# Altium PCB PCB1.PcbDoc
Units mm, origin at the board's own origin, x right, y up, seen from the top; angles counter-clockwise.
Board outline 50 x 50 mm, 2 copper layers (Top Layer, Bottom Layer); 9 components, 8 nets, 33 pads, 0 vias.
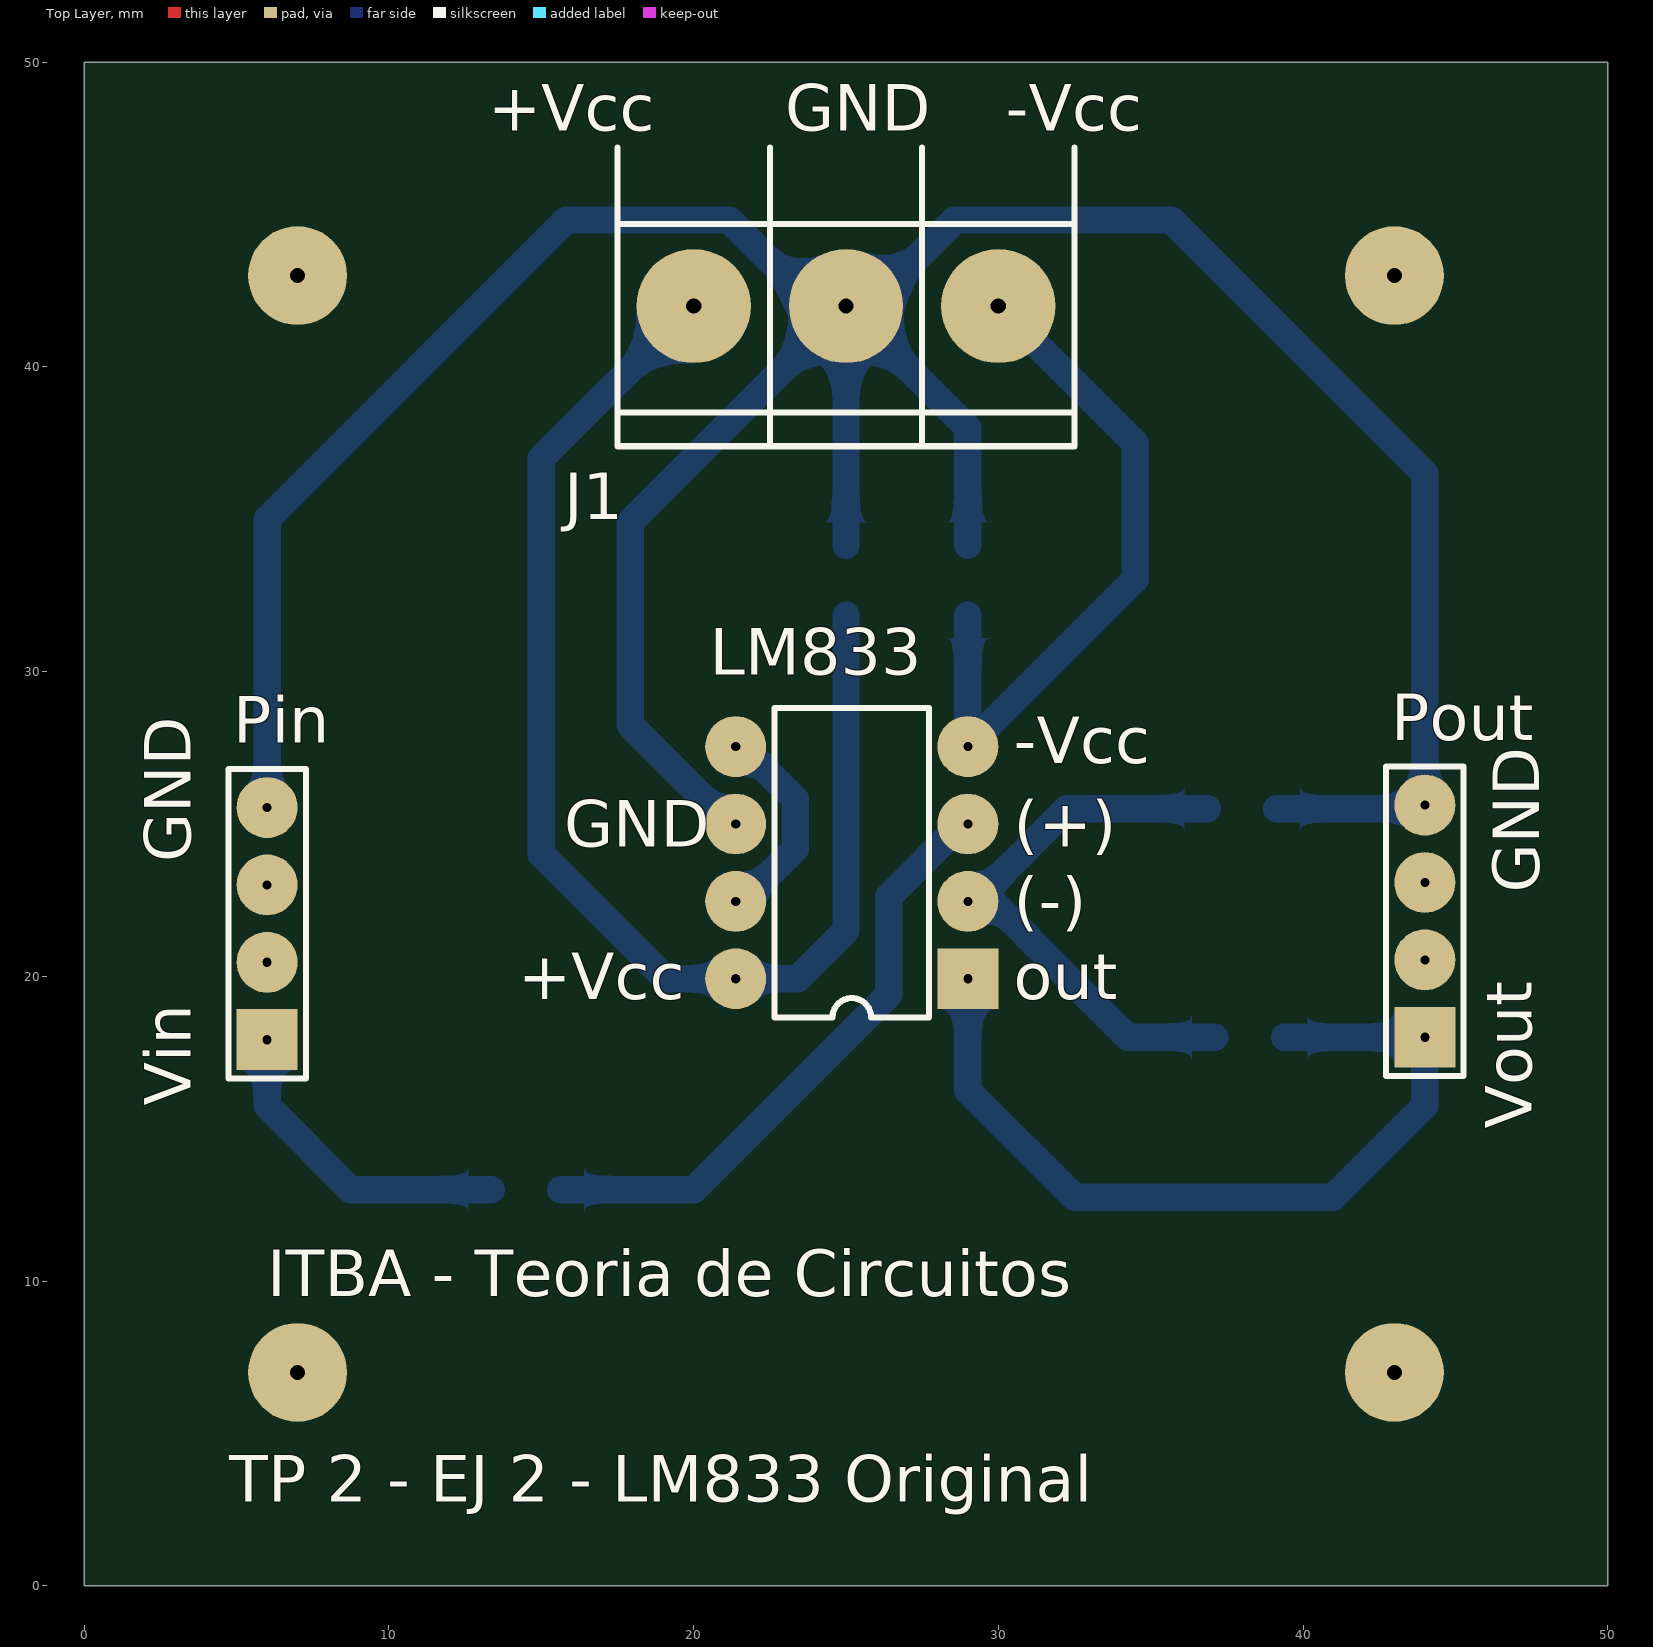
[diagram p0: Top Layer view]
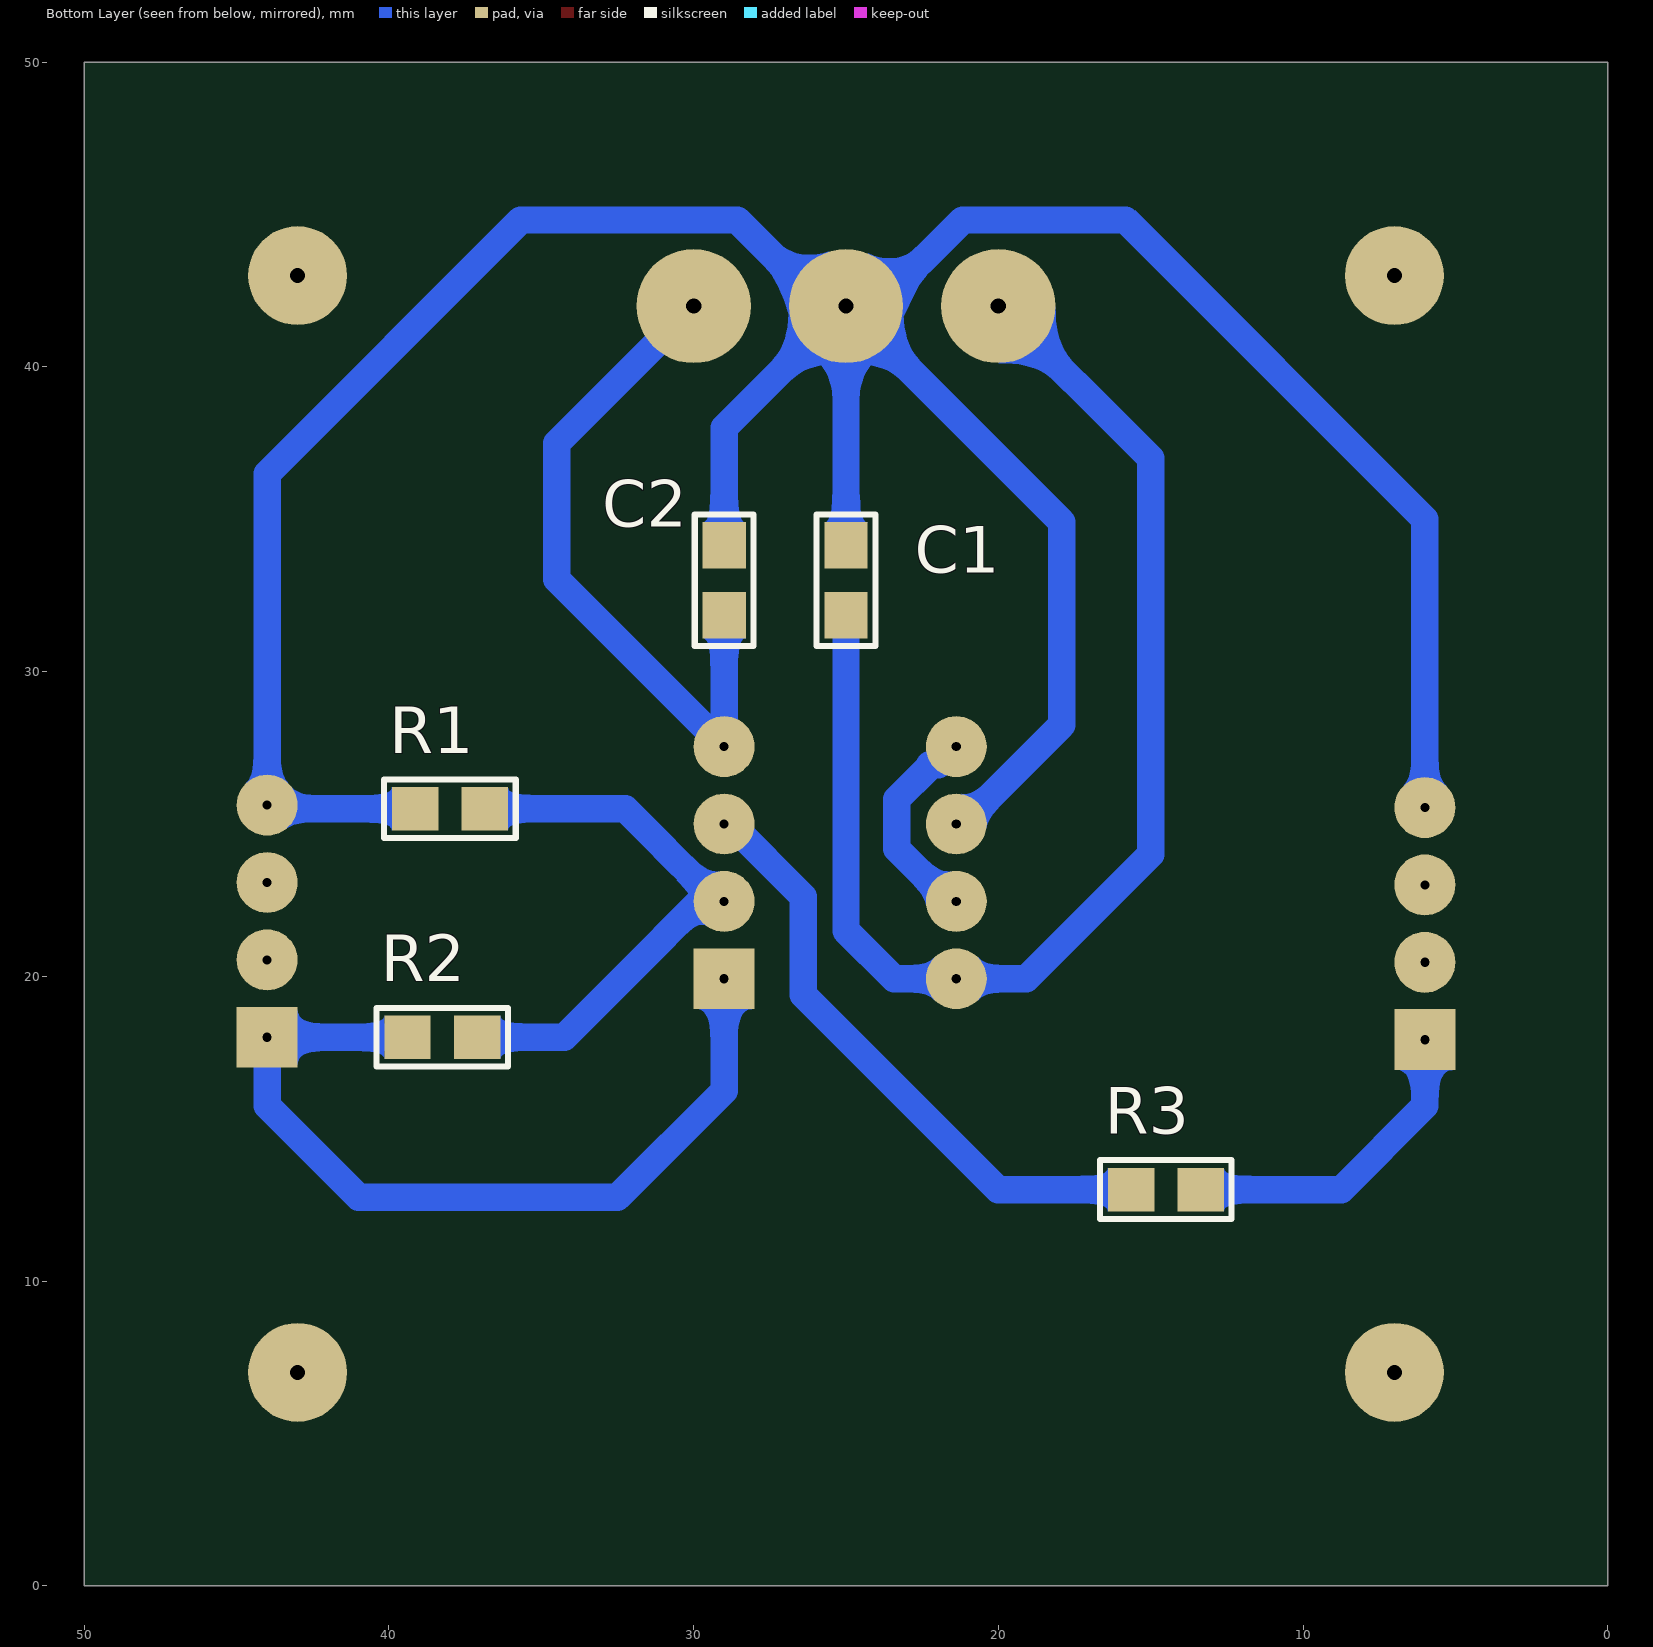
[diagram p1: Bottom Layer view, seen from below]
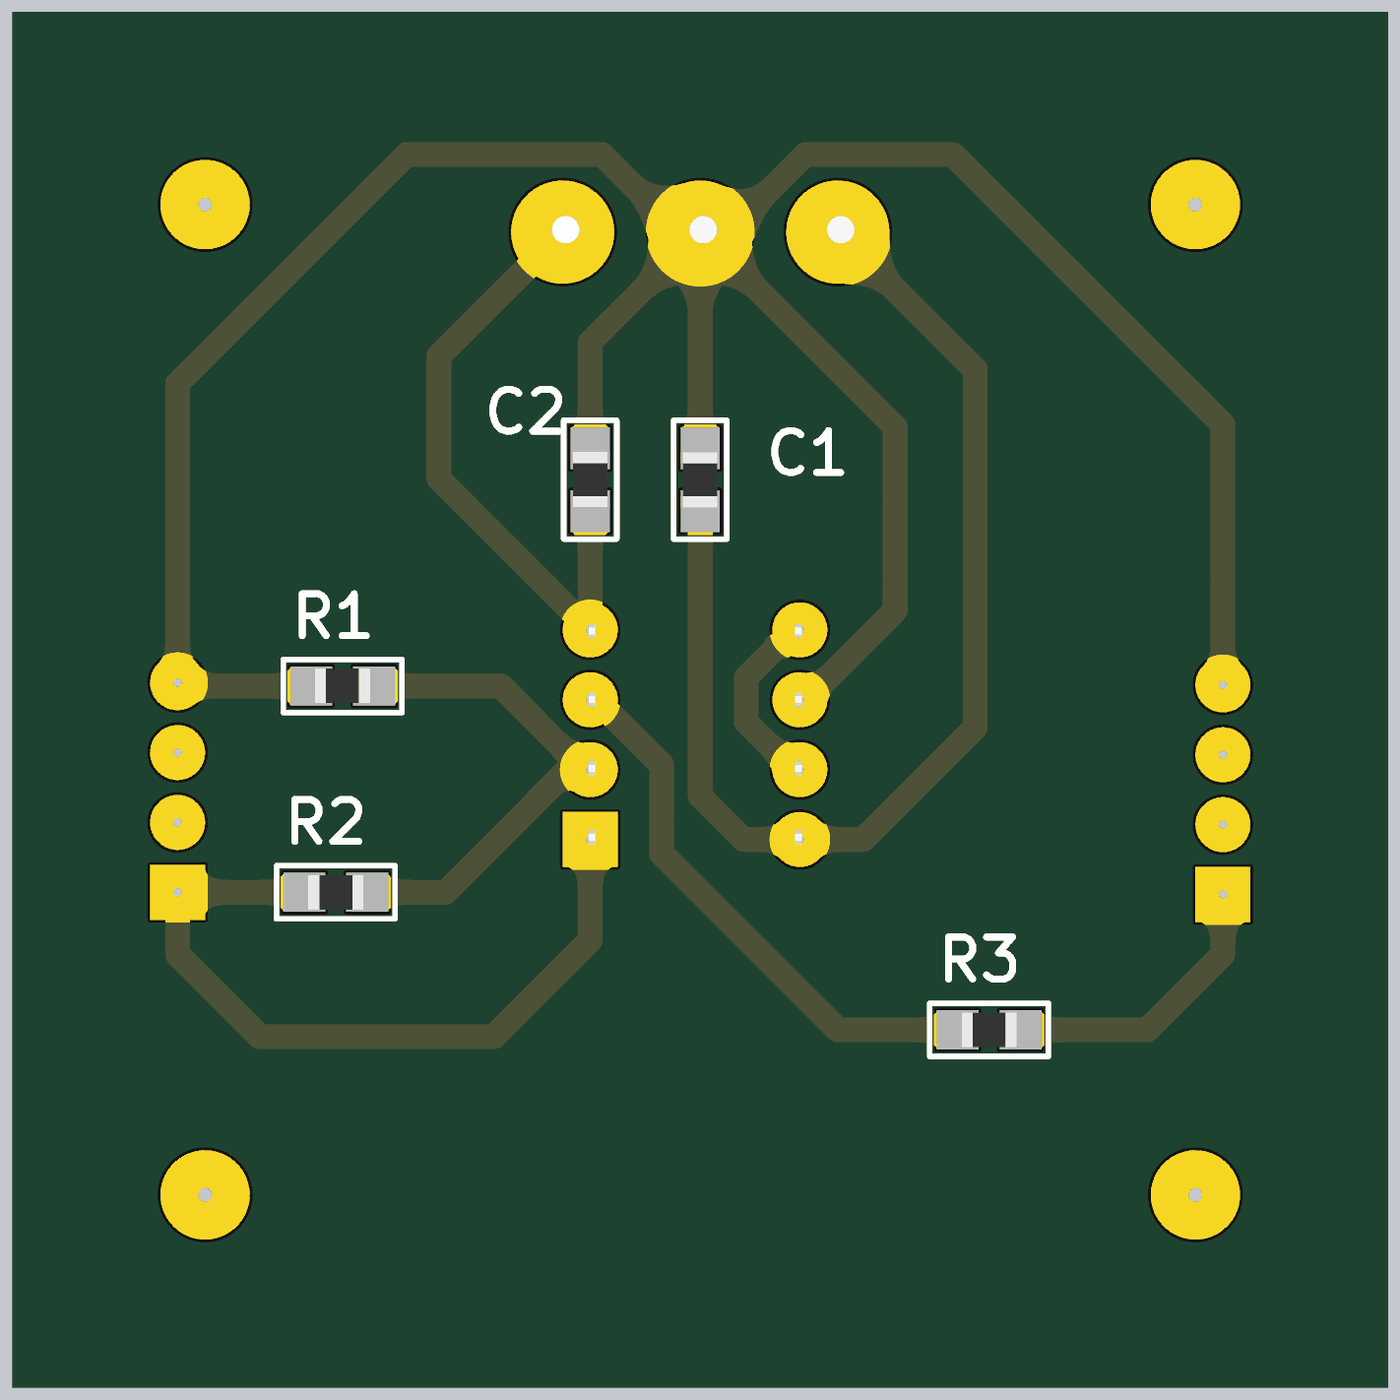
[diagram p2: 3D render of the assembled board from below, using the file's embedded part models]

## Layer stack, top to bottom
Top Solder: solder mask 0.0102, Solder Resist, Dk 3.5
Top Layer: signal copper 0.0356
Dielectric 1: dielectric 0.32, FR-4, Dk 4.8
Bottom Layer: signal copper 0.0356
Bottom Solder: solder mask 0.0102, Solder Resist, Dk 3.5

## Board outline
0,0 50,0 50,50 0,50

## Design rules (kind name [scope] priority, off if disabled: settings)
Clearance [All] p1: gap=0.5 ignorepadtopadclearanceinfootprint=FALSE
PolygonConnect [All] p1: connectstyle=Relief reliefconductorwidth=0.254 reliefentries=4 polygonreliefangle="90 Angle" airgapwidth=0.254
RoutingVias [All] p1: holewidth=0.5 width=2 viastyle="Through Hole" minholewidth=0.3 minwidth=2.5 maxholewidth=0.5 maxwidth=2
SolderMaskExpansion [All] p1: expansion=0.102
Width [All] p1: maxlimit=0.9 minlimit=0.6 preferedwidth=0.9
30 further rules are at their usual default settings.

## Components (designator, comment, footprint, x,y, rotation, side; value= is the part's Value field where it differs from the comment)
C1 "CAP" 0805 25,33 r90 bottom
C2 "CAP" 0805 29,33 r270 bottom
J1 "BORNERA 3" BORNERA3 25,42 r90 top
LM833 "LM833" DIP8 29,19.92 r180 top (schematic designator U1)
Pin "Header 4" HDR1X4 6,17.92 r90 top
Pout "Header 4" HDR1X4 44,18 r90 top
R1 "RES" 0805 38,25.5 r180 bottom
R2 "RES" 0805 38.25,18 r0 bottom
R3 "RES" 0805 14.5,13 r0 bottom

## Footprints (in the part's own frame and the unit in brackets; to place one, negate y for a bottom-side part, rotate by r counter-clockwise, add the part's x,y. Pads: shape width x height; smd on the part's side, far side on the other; paste and mask are expansions set on the pad)
0805 [mil] "Pasivo 0805"
  rect 60x56 smd: 1(-45,0) 2(45,0)
  silkscreen extent -85,-38 85,38, body extent -39,-24 39,25, height 15
BORNERA3 [mm] "Bornera con Tornillos 5mm separación"
  round 3.75 hole 0.5: 1(0,5) 2(0,0) 3(0,-5)
  silkscreen extent -4.6,-7.5 5.2,7.5, body extent -3.76,-7.39 3.94,8.11, height 10.05
DIP8 [mm]
  rect 2x2 hole 0.3: 1(0,0)
  round 2 hole 0.3: 2(0,-2.54) 3(0,-5.08) 4(0,-7.62) 5(7.62,-7.62) 6(7.62,-5.08) 7(7.62,-2.54) 8(7.62,0)
  silkscreen extent 1.27,-8.89 6.35,1.27, body extent -0.06,-9.21 7.7,1.59, height 4.5
HDR1X4 [mm] "Connector; Header; 4 Position"
  rect 2x2 hole 0.3: 1(0,0)
  round 2 hole 0.3: 2(2.54,0) 3(5.08,0) 4(7.62,0)
  silkscreen extent -1.27,-1.27 8.89,1.27

## Part data
LM833: "Dual Audio Operational Amplifier"
Pin Pout: "Header, 4-Pin", LatestRevisionDate=17-Jul-2002, LatestRevisionNote="Re-released for DXP Platform.", Publisher="Altium Limited"

## Free pads (board coordinates)
  round 3.25 hole 0.5: 5(7,7) 6(43,7) 7(43,43) 8(7,43)

## Nets (pads, with @x,y where several pads share a name; then routed paths per layer and width w, separated by ;. In a path a pad name is that pad's centre, name@x,y a point inside that pad or via, vN(x,y) a via of type N, cw(c..) or ccw(c..) an arc to the next point about the centre after c; other vN are vias at no path point)
+Vcc: C1.1 J1.1 LM833.8 | length 42.8
  Bottom Layer w0.9: J1.1 15,37 15,24 19.08,19.92 LM833.8 23.42,19.92 25,21.5 C1.1
-Vcc: C2.2 J1.3 LM833.4 | length 22.9
  Bottom Layer w0.9: C2.2 LM833.4 34.5,33.04 34.5,37.5 J1.3
GND: C1.2 C2.1 J1.2 LM833.6 Pin.4 Pout.4 R1.1 | length 112
  Bottom Layer w0.9: Pin.4 6,35 15.825,44.825 21.17,44.825 24,41.995 24,42 J1.2 ; LM833.6 21.162,25 17.912,28.25 17.912,34.912 J1.2 ; C1.2 J1.2 ; C2.1 29,38 J1.2 ; R1.1 43.88,25.5 Pout.4 44,36.5 35.675,44.825 28.575,44.825 25.75,42 J1.2
NetPin_1: Pin.1 R3.1 | length 10.7
  Bottom Layer w0.9: Pin.1 6,15.75 8.75,13 R3.1
NetPout_1: LM833.1 Pout.1 R2.2 | length 28.2
  Bottom Layer w0.9: LM833.1 29,16.25 32.5,12.75 41,12.75 44,15.75 Pout.1 R2.2
NetR1_2: LM833.2 R1.2 R2.1 | length 19.1
  Bottom Layer w0.9: R1.2 32.25,25.5 30.95,24.2 30.95,24.192 29.808,23.05 29.59,23.05 LM833.2 29.804,22.46 30.95,21.314 30.95,21.3 34.25,18 R2.1
NetR3_2: LM833.3 R3.2 | length 20.2
  Bottom Layer w0.9: R3.2 20,13 26.4,19.4 26.4,22.618 28.782,25 LM833.3
NetU1_5: LM833.5 LM833.7 | length 7
  Bottom Layer w0.9: LM833.7 21.598,22.46 23.33,24.192 23.33,25.808 22.25,26.888 22.25,26.95 21.97,26.95 LM833.5
pads on no net: Pin.2 Pin.3 Pout.2 Pout.3

## Silkscreen, mask and mechanical layers (free items; w line width, h text height)
Top Overlay:
  text "+Vcc" at 13.25,47.75 h1.52
  text "GND" at 23,47.75 h1.52
  text "-Vcc" at 30.25,47.75 h1.52
  text "-Vcc" at 30.5,27 h1.52
  text "GND" at 15.75,24.25 h1.52
  text "(+)" at 30.5,24.25 h1.52
  text "GND" at 3.5,23.75 h1.52 r90
  text "GND" at 47.75,22.75 h1.52 r90
  text "(-)" at 30.5,21.75 h1.52
  text "+Vcc" at 14.25,19.25 h1.52
  text "out" at 30.5,19.25 h1.52
  text "Vin" at 3.5,15.75 h1.52 r90
  text "Vout" at 47.5,15 h1.52 r90
  text "ITBA - Teoria de Circuitos" at 6,9.5 h1.52
  text "TP 2 - EJ 2 - LM833 Original" at 4.75,2.75 h1.52
Mechanical 1:
  the board outline again, w0.1